# EAGLE board Module_AIO (EAGLE 9.2.1), part 1 of 3
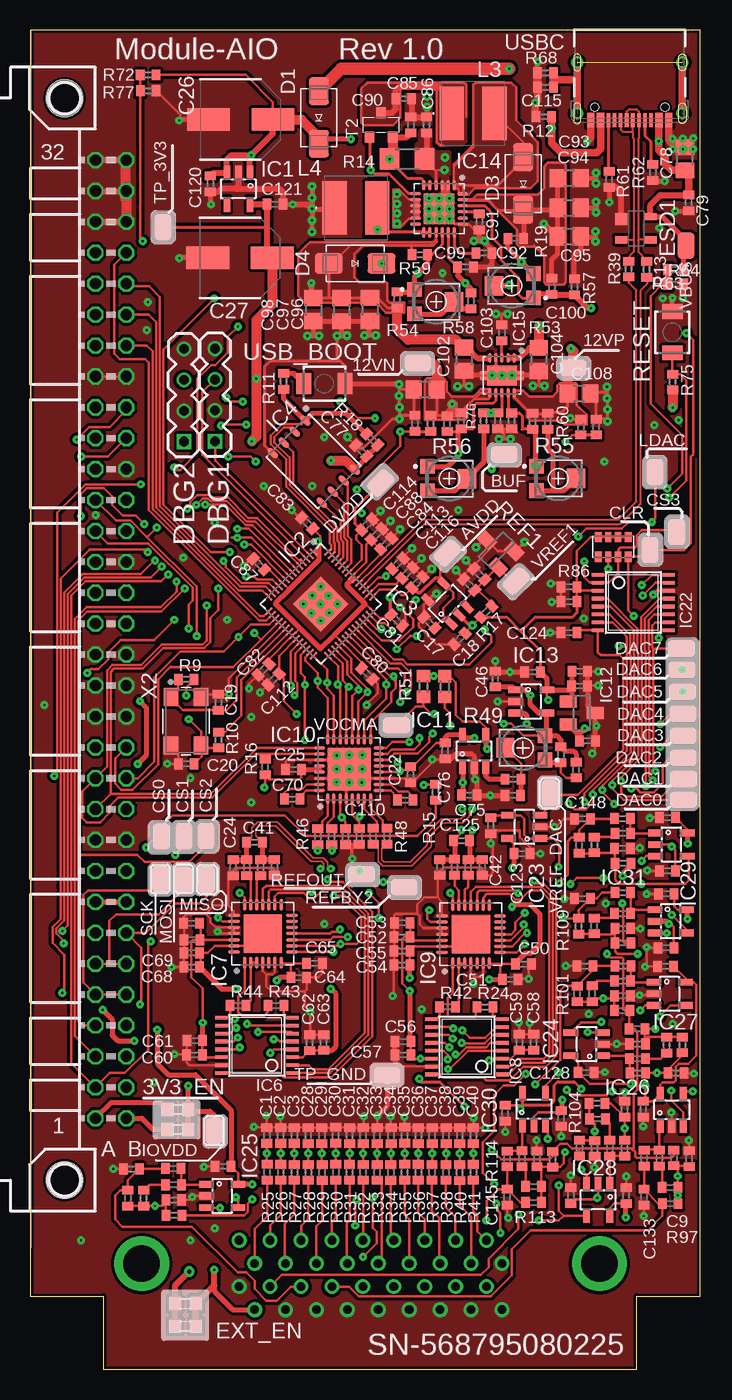
[diagram p0: board, top side]
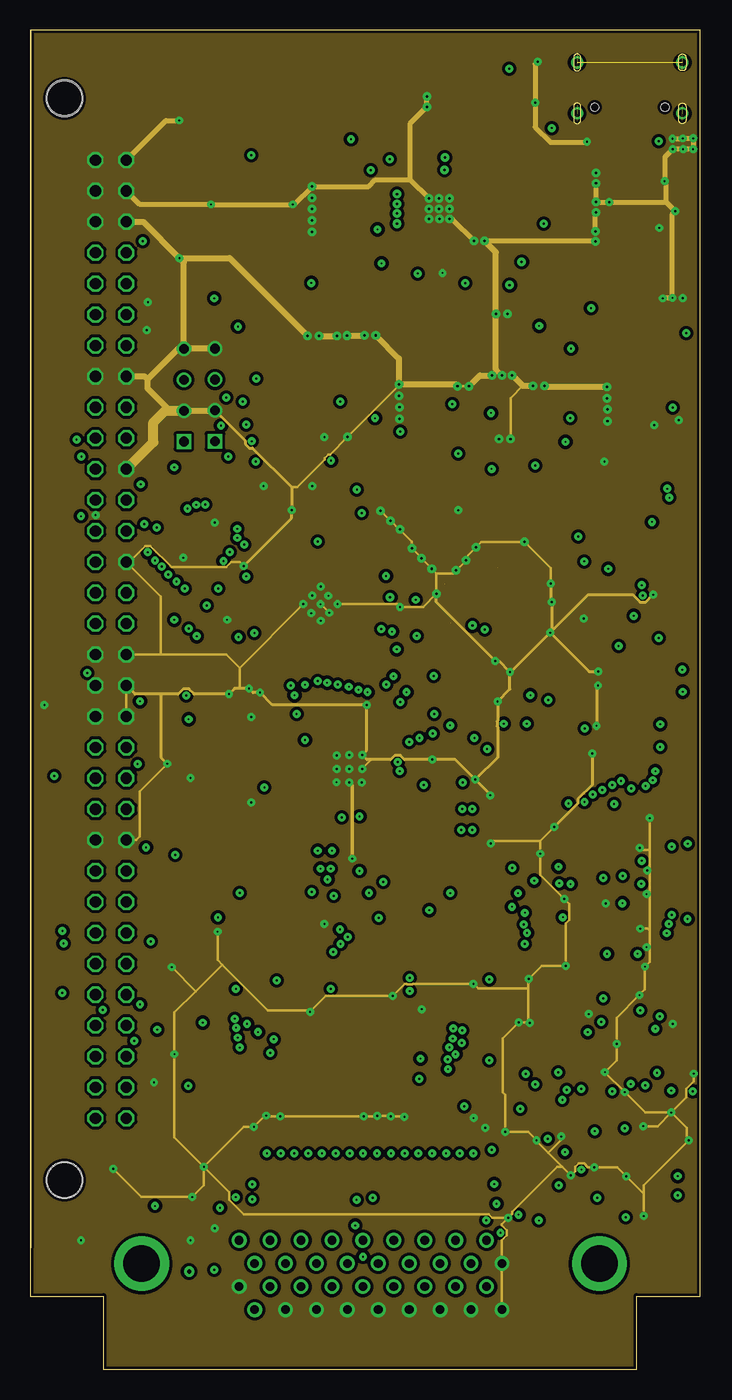
[diagram p1: board, inner layer Route2]
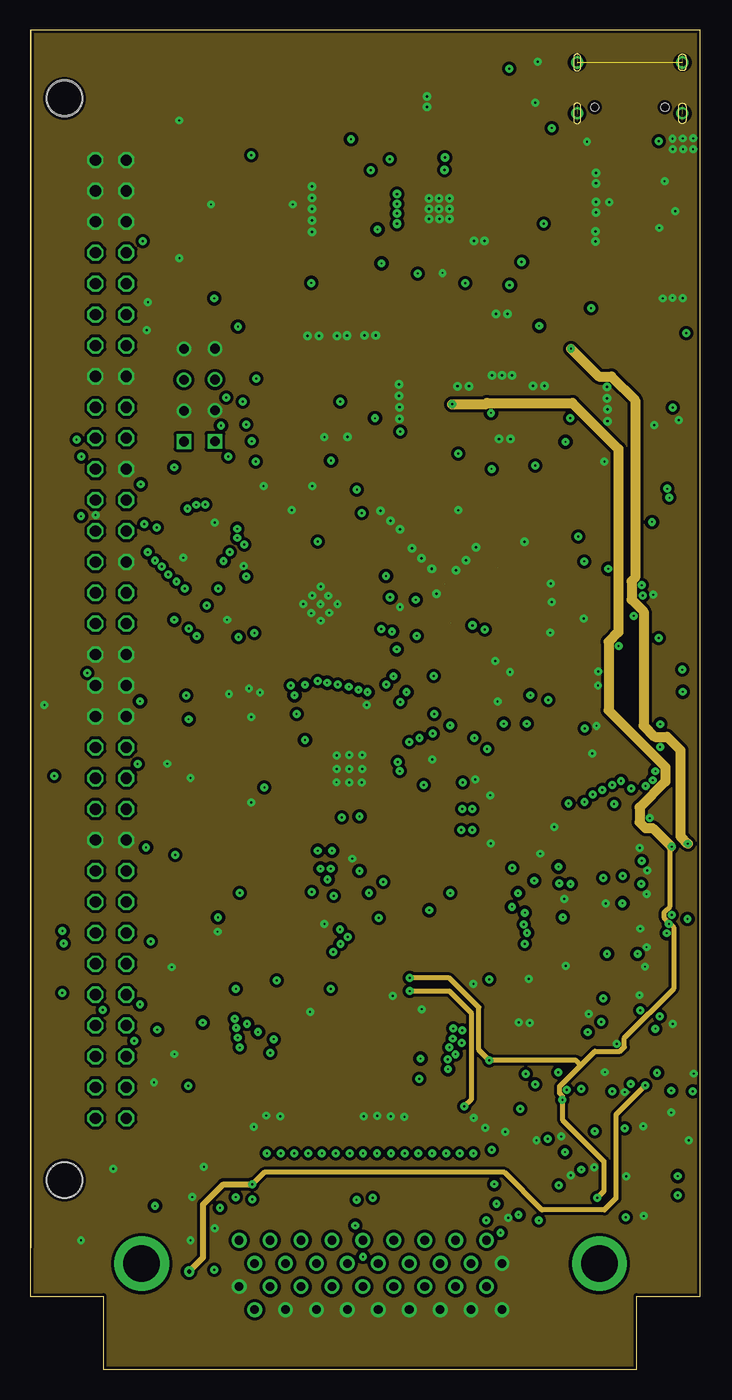
[diagram p2: board, inner layer Route15]
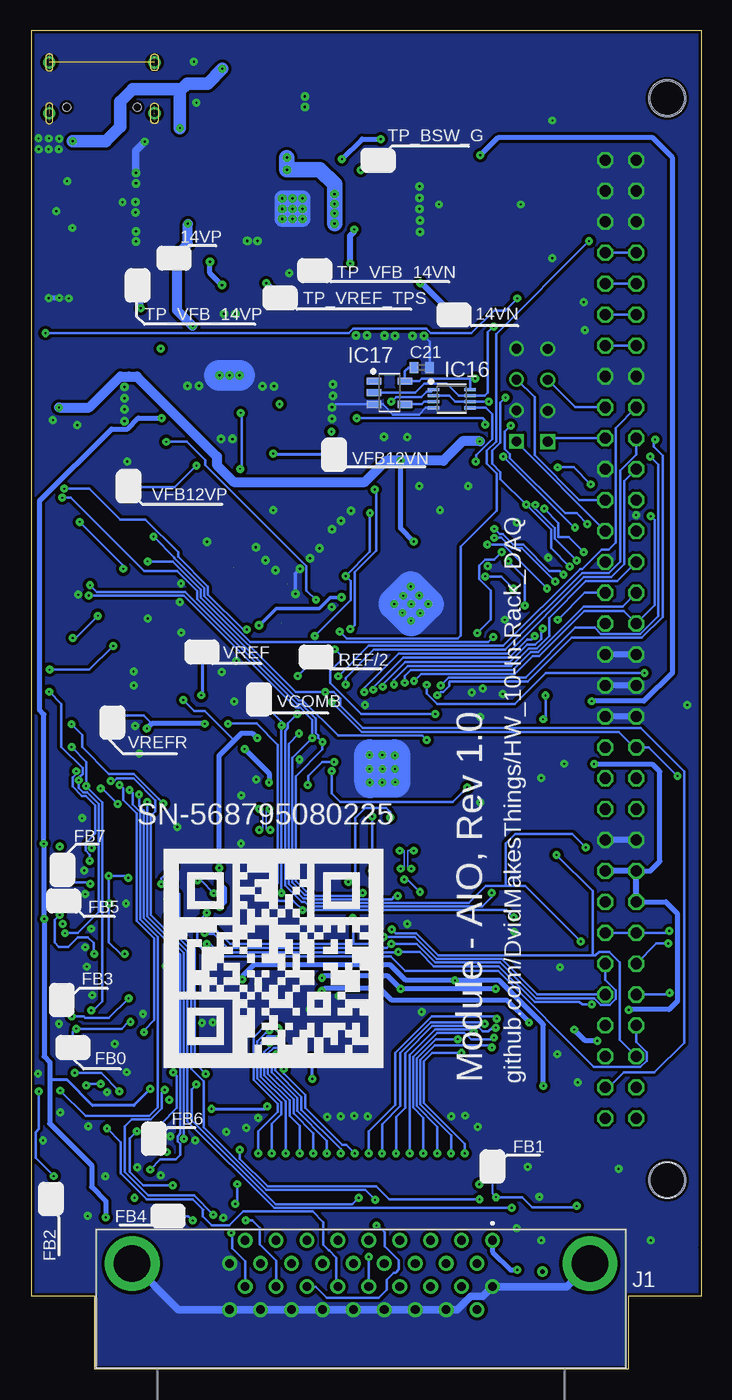
[diagram p3: board, bottom side, seen from below]

Size 55 x 110 mm. Coordinates in mm from the lower left corner, seen from the top.
Outline: 0,6 6,6 6,0 49.8,0 49.8,6 55,6 55,110 0,110 0,6
Copper layers (1+2*15+16): Top 0.035mm / dielectric 0.0994mm / Route2 0.0152mm / dielectric 1.265mm / Route15 0.0152mm / dielectric 0.0994mm / Bottom 0.035mm
Design rules "JLC04161H-3313": minimum track width 3.5mil, minimum drill 0.15mm, track to track 3.5mil, track to pad 3.5mil, pad to pad 3.5mil, via to via 3.5mil, smd to smd 3.5mil, copper to edge 0.2mm, drill to drill 6mil, minimum pad ring 8mil, minimum via ring 0.25mm, stop-mask expansion 0.05mm, vias tented up to drill 16mil, thermal gap 10mil
Net classes: 1 50R_DIFFPAIR: width 0.4 mm, drill 0.15 mm, clearance 0.191 mm; 2 90R_DIFFPAIR: width 0.155 mm, drill 0.15 mm, clearance 0.191 mm; 3 100R_DIFFPAIR: width 0.121 mm, drill 0.15 mm, clearance 0.191 mm
Holes 3 mm at 2.79,15.52 2.79,104.42

## Footprints (pad centres in the part's own frame; a part is rotated, then mirrored left to right if it is on the bottom)
TP = smd 2.2 x 1.4: TP 0,0
C0402 = smd 0.7 x 0.9: 1 -0.65,0; 2 0.65,0
100UF-16V = smd 3.5 x 1.85: 1 -2.65,0; 2 2.65,0
0805 = smd 1.3 x 1.5: 1 -0.95,0; 2 0.95,0
0402 = smd 0.7 x 0.9: 1 -0.65,0; 2 0.65,0
C0805 = smd 1.3 x 1.5: 1 -0.95,0; 2 0.95,0
SMA = smd 2.28 x 1.66: A 2.165,0; C -2.165,0
1X4 = drill 0.8 square: 1 0,3.81 | drill 0.8: 2 0,1.27; 3 0,-1.27; 4 0,-3.81
SOT143 = smd 1 x 1: 1 -0.75,-1.2 | smd 0.6 x 1: 2 0.95,-1.2; 3 0.95,1.2; 4 -0.95,1.2
SOT23-5 = smd 0.55 x 1.2: 1 -0.95,-1.3; 2 0,-1.3; 3 0.95,-1.3; 4 0.95,1.3; 5 -0.95,1.3
QFN40P700X700X100-57T510 = smd 0.837 x 0.22: 1 -3.437,2.6; 2 -3.437,2.2; 3 -3.437,1.8; 4 -3.437,1.4; 5 -3.437,1; 6 -3.437,0.6; 7 -3.437,0.2; 8 -3.437,-0.2; 9 -3.437,-0.6; 10 -3.437,-1; 11 -3.437,-1.4; 12 -3.437,-1.8; 13 -3.437,-2.2; 14 -3.437,-2.6; 29 3.437,-2.6; 30 3.437,-2.2; 31 3.437,-1.8; 32 3.437,-1.4; 33 3.437,-1; 34 3.437,-0.6; 35 3.437,-0.2; 36 3.437,0.2; 37 3.437,0.6; 38 3.437,1; 39 3.437,1.4; 40 3.437,1.8; 41 3.437,2.2; 42 3.437,2.6 | smd 0.22 x 0.837: 15 -2.6,-3.437; 16 -2.2,-3.437; 17 -1.8,-3.437; 18 -1.4,-3.437; 19 -1,-3.437; 20 -0.6,-3.437; 21 -0.2,-3.437; 22 0.2,-3.437; 23 0.6,-3.437; 24 1,-3.437; 25 1.4,-3.437; 26 1.8,-3.437; 27 2.2,-3.437; 28 2.6,-3.437; 43 2.6,3.437; 44 2.2,3.437; 45 1.8,3.437; 46 1.4,3.437; 47 1,3.437; 48 0.6,3.437; 49 0.2,3.437; 50 -0.2,3.437; 51 -0.6,3.437; 52 -1,3.437; 53 -1.4,3.437; 54 -1.8,3.437; 55 -2.2,3.437; 56 -2.6,3.437 | smd 3.2 x 3.2: 57 0,0
SON127P600X500X75-8N = smd 1.012 x 0.432: 1 -2.85,1.905; 2 -2.85,0.635; 3 -2.85,-0.635; 4 -2.85,-1.905; 5 2.85,-1.905; 6 2.85,-0.635; 7 2.85,0.635; 8 2.85,1.905
TSSOP2 = smd 0.305 x 0.991: 1 -2.275,-2.918; 2 -1.625,-2.918; 3 -0.975,-2.918; 4 -0.325,-2.918; 5 0.325,-2.918; 6 0.975,-2.918; 7 1.625,-2.918; 8 2.275,-2.918; 9 2.275,2.918; 10 1.625,2.918; 11 0.975,2.918; 12 0.325,2.918; 13 -0.325,2.918; 14 -0.975,2.918; 15 -1.625,2.918; 16 -2.275,2.918
QFN50P500X500X75-29T314N = smd 0.968 x 0.27: 1 -2.381,1.5; 2 -2.381,1; 3 -2.381,0.5; 4 -2.381,0; 5 -2.381,-0.5; 6 -2.381,-1; 7 -2.381,-1.5; 15 2.381,-1.5; 16 2.381,-1; 17 2.381,-0.5; 18 2.381,0; 19 2.381,0.5; 20 2.381,1; 21 2.381,1.5 | smd 0.27 x 0.968: 8 -1.5,-2.381; 9 -1,-2.381; 10 -0.5,-2.381; 11 0,-2.381; 12 0.5,-2.381; 13 1,-2.381; 14 1.5,-2.381; 22 1.5,2.381; 23 1,2.381; 24 0.5,2.381; 25 0,2.381; 26 -0.5,2.381; 27 -1,2.381; 28 -1.5,2.381 | smd 3.14 x 3.14: 29 0,0
VQFN32-5X5 = smd 0.86 x 0.27: 1 -2.435,1.75; 2 -2.435,1.25; 3 -2.435,0.75; 4 -2.435,0.25; 5 -2.435,-0.25; 6 -2.435,-0.75; 7 -2.435,-1.25; 8 -2.435,-1.75; 17 2.435,-1.75; 18 2.435,-1.25; 19 2.435,-0.75; 20 2.435,-0.25; 21 2.435,0.25; 22 2.435,0.75; 23 2.435,1.25; 24 2.435,1.75 | smd 0.27 x 0.86: 9 -1.75,-2.435; 10 -1.25,-2.435; 11 -0.75,-2.435; 12 -0.25,-2.435; 13 0.25,-2.435; 14 0.75,-2.435; 15 1.25,-2.435; 16 1.75,-2.435; 25 1.75,2.435; 26 1.25,2.435; 27 0.75,2.435; 28 0.25,2.435; 29 -0.25,2.435; 30 -0.75,2.435; 31 -1.25,2.435; 32 -1.75,2.435 | smd 3.5 x 3.5: 33 0,0
SOT23 = smd 1 x 1.4: 1 -0.95,-1.1; 2 0.95,-1.1; 3 0,1.1
VQFN24-4X4-THERMAL2.5X2.5 = smd 0.86 x 0.27: 1 -1.935,1.25; 2 -1.935,0.75; 3 -1.935,0.25; 4 -1.935,-0.25; 5 -1.935,-0.75; 6 -1.935,-1.25; 13 1.935,-1.25; 14 1.935,-0.75; 15 1.935,-0.25; 16 1.935,0.25; 17 1.935,0.75; 18 1.935,1.25 | smd 0.27 x 0.86: 7 -1.25,-1.935; 8 -0.75,-1.935; 9 -0.25,-1.935; 10 0.25,-1.935; 11 0.75,-1.935; 12 1.25,-1.935; 19 1.25,1.935; 20 0.75,1.935; 21 0.25,1.935; 22 -0.25,1.935; 23 -0.75,1.935; 24 -1.25,1.935 | smd 2.5 x 2.5: 25 0,0
WSON10-3X3 = smd 0.86 x 0.264: 1 -1.435,1; 2 -1.435,0.5; 3 -1.435,0; 4 -1.435,-0.5; 5 -1.435,-1; 6 1.435,-1; 7 1.435,-0.5; 8 1.435,0; 9 1.435,0.5; 10 1.435,1 | smd 1.65 x 2.4: PAD 0,0 | smd 0.264 x 0.86: PAD1 -0.25,1.435; PAD2 -0.25,-1.435; PAD3 0.25,-1.435; PAD4 0.25,1.435
SOP50P310X90-8N = smd 0.923 x 0.268: 1 -1.503,0.75; 2 -1.503,0.25; 3 -1.503,-0.25; 4 -1.503,-0.75; 5 1.503,-0.75; 6 1.503,-0.25; 7 1.503,0.25; 8 1.503,0.75
SOT95P280X145-5N = smd 1.186 x 0.597: 1 -1.264,0.95; 2 -1.264,0; 3 -1.264,-0.95; 4 1.264,-0.95; 5 1.264,0.95
TSSOP16 = smd 0.305 x 0.991: 1 -2.275,-2.918; 2 -1.625,-2.918; 3 -0.975,-2.918; 4 -0.325,-2.918; 5 0.325,-2.918; 6 0.975,-2.918; 7 1.625,-2.918; 8 2.275,-2.918; 9 2.275,2.918; 10 1.625,2.918; 11 0.975,2.918; 12 0.325,2.918; 13 -0.325,2.918; 14 -0.975,2.918; 15 -1.625,2.918; 16 -2.275,2.918
MDB36 = drill 0.71 pad 1.217: 1 10.16,8.89; 2 8.89,6.99; 3 7.62,8.89; 4 6.35,6.99; 5 5.08,8.89; 6 3.81,6.99; 7 2.54,8.89; 8 1.27,6.99; 9 0,8.89; 10 -1.27,6.99; 11 -2.54,8.89; 12 -3.81,6.99; 13 -5.08,8.89; 14 -6.35,6.99; 15 -7.62,8.89; 16 -8.89,6.99; 17 -10.16,8.89; 18 -11.43,6.99; 19 10.16,5.09; 20 8.89,3.19; 21 7.62,5.09; 22 6.35,3.19; 23 5.08,5.09; 24 3.81,3.19; 25 2.54,5.09; 26 1.27,3.19; 27 0,5.09; 28 -1.27,3.19; 29 -2.54,5.09; 30 -3.81,3.19; 31 -5.08,5.09; 32 -6.35,3.19; 33 -7.62,5.09; 34 -8.89,3.19; 35 -10.16,5.09; 36 -11.43,3.19 | drill 2.85 pad 4.275: MH1 18.17,6.99; MH2 -19.44,6.99
0603 = smd 1 x 1.1: 1 -0.85,0; 2 0.85,0
SRR5228A = smd 4.4 x 2: 1 0,1.75; 2 0,-1.75
1206 = smd 1.6 x 1.803: 1 -1.422,0; 2 1.422,0
TC33X = smd 1.2 x 1.2: 1 -1,-1.8; 3 1,-1.8 | smd 1.6 x 1.5: 2 0,1.45
YC164-JR-0733RL = smd 0.67 x 0.85: 1 -1.24,-0.81; 4 1.24,-0.81; 5 1.24,0.81; 8 -1.24,0.81 | smd 0.59 x 0.85: 2 -0.4,-0.81; 3 0.4,-0.81; 6 0.4,0.81; 7 -0.4,0.81
SWITCH-OMRON_B3U-1000P = smd 1.2 x 1.7: 1 -1.7,0; 2 1.7,0
MICRO3 = smd 0.8 x 0.9: 1 -0.95,-1; 2 0.95,-1; 3 0,1
629722000214 = smd 0.3 x 1.15: A1 -3.35,4.745; A4 -2.55,4.745; A5 -1.25,4.745; A6 -0.25,4.745; A7 0.25,4.745; A8 1.25,4.745; A9 2.55,4.745; A12 3.35,4.745; B1 3.05,4.745; B4 2.25,4.745; B5 1.75,4.745; B6 0.75,4.745; B7 -0.75,4.745; B8 -1.75,4.745; B9 -2.25,4.745; B12 -3.05,4.745 | drill 0.6 pad 1: S1 -4.32,4.18; S2 4.32,4.18; S3 -4.32,0; S4 4.32,0 | hole 0.65: -2.89,3.68; 2.89,3.68
CON-VG_MAB64 = drill 0.914 octagon: A1 -2.54,39.37; A2 -2.54,36.83; A3 -2.54,34.29; A4 -2.54,31.75; A5 -2.54,29.21; A6 -2.54,26.67; A7 -2.54,24.13; A8 -2.54,21.59; A9 -2.54,19.05; A10 -2.54,16.51; A11 -2.54,13.97; A12 -2.54,11.43; A13 -2.54,8.89; A14 -2.54,6.35; A15 -2.54,3.81; A16 -2.54,1.27; A17 -2.54,-1.27; A18 -2.54,-3.81; A19 -2.54,-6.35; A20 -2.54,-8.89; A21 -2.54,-11.43; A22 -2.54,-13.97; A23 -2.54,-16.51; A24 -2.54,-19.05; A25 -2.54,-21.59; A26 -2.54,-24.13; A27 -2.54,-26.67; A28 -2.54,-29.21; A29 -2.54,-31.75; A30 -2.54,-34.29; A31 -2.54,-36.83; A32 -2.54,-39.37; B1 -5.08,39.37; B2 -5.08,36.83; B3 -5.08,34.29; B4 -5.08,31.75; B5 -5.08,29.21; B6 -5.08,26.67; B7 -5.08,24.13; B8 -5.08,21.59; B9 -5.08,19.05; B10 -5.08,16.51; B11 -5.08,13.97; B12 -5.08,11.43; B13 -5.08,8.89; B14 -5.08,6.35; B15 -5.08,3.81; B16 -5.08,1.27; B17 -5.08,-1.27; B18 -5.08,-3.81; B19 -5.08,-6.35; B20 -5.08,-8.89; B21 -5.08,-11.43; B22 -5.08,-13.97; B23 -5.08,-16.51; B24 -5.08,-19.05; B25 -5.08,-21.59; B26 -5.08,-24.13; B27 -5.08,-26.67; B28 -5.08,-29.21; B29 -5.08,-31.75; B30 -5.08,-34.29; B31 -5.08,-36.83; B32 -5.08,-39.37 | hole 2.794: 0,44.45; 0,-44.45
OSCCC500X320X130 = smd 1.487 x 1.187: 1 -1.988,-1.238; 2 1.988,-1.238; 3 1.988,1.238; 4 -1.988,1.238

## Placement (x,y rotation side)
12VN  TP  [TP]  31.81,82.67 0 top
12VP  TP  [TP]  44.59,82.29 0 top
14VN  TP  [TP]  20.31,86.61 180 bottom
14VP  TP  [TP]  43.3,91.33 0 bottom
AVDD  TP  [TP]  34.26,67.04 45 top
BUF  TP  [TP]  38.92,75.17 0 top
C1  100nF  [C0402]  19.43,19.2 90 top
C2  100nF  [C0402]  20.55,19.2 90 top
C3  100nF  [C0402]  21.68,19.2 90 top
C4  100nF  [C0402]  44.4,14.27 90 top
C5  100nF  [C0402]  52.2,34.61 180 top
C6  100nF  [C0402]  43.6,20.6 270 top
C7  100nF  [C0402]  52.32,40.94 180 top
C8  100nF  [C0402]  9.29,14.05 270 top
C9  100nF  [C0402]  52.53,14.92 0 top
C10  100nF  [C0402]  46.14,30.85 270 top
C11  100nF  [C0402]  46.33,43.07 270 top
C12  100nF  [C0402]  41.33,15 0 top
C13  100nF  [C0402]  46.3,36.41 270 top
C14  100nF  [C0402]  46.58,20.56 180 top
C15  1uF  [C0402]  36.03,64.46 135 top
C16  100nF  [C0402]  36.87,65.32 135 top
C17  100nF  [C0402]  32.77,61.33 135 top
C18  100nF  [C0402]  35.25,60.01 225 top
C19  15pF  [C0402]  15.44,54.8 90 top
C20  15pF  [C0402]  12.79,49.73 180 top
C21  100nF  [C0402]  22.96,82.3 0 bottom
C22  100nF  [C0402]  31.22,48.83 270 top
C23  270pF  [C0402]  20.04,41.23 270 top
C24  270pF  [C0402]  16.64,41.19 90 top
C25  100nF  [C0402]  21.61,49.27 180 top
C26  100uF 16V  [100UF-16V]  17.27,102.67 180 top
C27  100uF 16V  [100UF-16V]  17.21,91.31 180 top
C28  100nF  [C0402]  22.82,19.19 90 top
C29  100nF  [C0402]  23.95,19.19 90 top
C30  100nF  [C0402]  25.07,19.21 90 top
C31  100nF  [C0402]  26.22,19.19 90 top
C32  100nF  [C0402]  27.32,19.19 90 top
C33  100nF  [C0402]  28.47,19.19 90 top
C34  100nF  [C0402]  29.62,19.19 90 top
C35  100nF  [C0402]  30.74,19.21 90 top
C36  100nF  [C0402]  31.87,19.19 90 top
C37  100nF  [C0402]  32.99,19.19 90 top
C38  100nF  [C0402]  34.14,19.19 90 top
C39  100nF  [C0402]  35.27,19.19 90 top
C40  100nF  [C0402]  36.39,19.19 90 top
C41  680pF  [C0402]  18.39,43.3 180 top
C42  270pF  [C0402]  37.12,41.23 270 top
C43  270pF  [C0402]  33.64,41.21 90 top
C44  680pF  [C0402]  35.42,43.42 180 top
C45  100nF  [C0402]  45.11,56.13 0 top
C46  100nF  [C0402]  38.18,56.71 90 top
C47  10uF  [C0402]  45.12,57.34 0 top
C48  [C0402]  45.75,51.63 0 top
C49  100nF  [C0402]  41.23,57.28 180 top
C50  1uF  [C0402]  40.49,33.29 0 top
C51  100nF  [C0402]  39.41,32.02 0 top
C52  1uF  [C0402]  30.53,35.49 180 top
C53  100nF  [C0402]  30.54,36.67 180 top
C54  1uF  [C0402]  30.51,33.2 180 top
C55  100nF  [C0402]  30.52,34.34 180 top
C56  1uF  [C0402]  30.61,26.92 180 top
C57  100nF  [C0402]  30.59,25.82 180 top
C58  1uF  [C0402]  41.34,26.86 90 top
C59  100nF  [C0402]  40.16,26.86 90 top
C60  1uF  [C0402]  13.47,25.82 180 top
C61  100nF  [C0402]  13.49,26.99 180 top
C62  1uF  [C0402]  22.94,26.83 90 top
C63  100nF  [C0402]  24.09,26.84 90 top
C64  1uF  [C0402]  22.04,32.17 0 top
C65  100nF  [C0402]  23.34,33.34 0 top
C66  1uF  [C0402]  13.26,35.27 180 top
C67  100nF  [C0402]  13.22,36.64 180 top
C68  1uF  [C0402]  13.24,33.05 180 top
C69  100nF  [C0402]  13.24,34.21 180 top
C70  10uF  [C0402]  21.51,46.84 0 top
C71  100nF  [C0402]  25.88,43.76 270 top
C72  1uF  [C0402]  44.82,49.23 270 top
C73  100nF  [C0402]  43.57,50.49 270 top
C74  [C0402]  39.62,47.15 180 top
C75  100nF  [C0402]  36.04,47.16 0 top
C76  100nF  [C0402]  34.07,50.8 270 top
C77  100nF  [C0402]  27.17,75.46 135 top
C78  10uF  [0805]  53.76,99.45 90 top
C79  100nF  [0402]  54.07,95.83 270 top
C80  100nF  [C0402]  27.65,57.14 315 top
C81  100nF  [C0402]  30.1,61.52 315 top
C82  100nF  [C0402]  19.16,57.49 225 top
C83  100nF  [C0402]  22.73,69.52 135 top
C84  100nF  [C0402]  29.21,67.83 45 top
C85  4.7uF  [C0402]  31.25,102.23 90 top
C86  100nF  [C0402]  32.53,102.24 90 top
C87  100nF  [C0402]  18.77,66.14 135 top
C88  100nF  [C0402]  28.44,68.61 45 top
C89  100nF  [C0402]  31.79,64.64 45 top
C90  10uF  [C0402]  30.67,104.39 0 top
C91  10nF  [C0402]  36.88,94.27 270 top
C92  4.7nF  [C0402]  37.26,91.71 0 top
C93  22uF  [C0805]  44.26,97.86 0 top
C94  22uF  [C0805]  44.26,95.41 0 top
C95  22uF  [C0805]  44.25,93.06 0 top
C96  22uF  [C0805]  27.88,87.06 270 top
C97  22uF  [C0805]  25.56,87.05 270 top
C98  22uF  [C0805]  23.23,87.05 270 top
C99  220nF  [C0402]  35.74,90.56 180 top
C100  10pF  [C0402]  42.83,88.97 270 top
C101  10pF  [C0402]  30.12,87.84 90 top
C102  10uF  [C0805]  35.6,82.97 270 top
C103  10nF  [C0402]  38.73,85.14 90 top
C104  10uF  [C0805]  41.76,82.96 270 top
C105  220nF  [C0402]  38.38,77.91 90 top
C106  10nF  [C0402]  34.23,77.69 270 top
C107  10nF  [C0402]  41.25,77.87 90 top
C108  22uF  [C0805]  45.06,80.16 0 top
C109  22uF  [C0805]  32.42,80.48 180 top
C110  10uF  [C0402]  30.79,46.75 180 top
C111  100nF  [C0402]  27.01,43.77 270 top
C112  100nF  [C0402]  19.97,56.67 225 top
C113  100nF  [C0402]  30.16,66.19 45 top
C114  100nF  [C0402]  27.65,69.39 45 top
C115  4.7nF  [0402]  42.3,105.33 180 top
C116  100nF  [C0402]  30.96,65.43 45 top
C120  100nF  [C0402]  14.77,97.38 270 top
C121  100nF  [C0402]  20.09,95.7 0 top
C122  1uF  [C0402]  44.24,64.27 180 top
C123  100nF  [C0402]  40.37,42.36 0 top
C124  1uF  [C0402]  44.24,60.52 180 top
C125  100nF  [C0402]  37.81,44.65 270 top
C126  100nF  [C0402]  44.24,63.06 180 top
C127  20nF  [C0402]  53.04,24.33 0 top
C128  100nF  [C0402]  45.63,24.37 0 top
C129  100nF  [C0402]  52.26,26.63 90 top
C130  20nF  [C0402]  8.3,16.45 180 top
C131  100nF  [C0402]  15.83,16.66 180 top
C133  20nF  [C0402]  50.4,14.13 270 top
C134  100nF  [C0402]  50.34,21.36 270 top
C136  20nF  [C0402]  45.56,33.12 180 top
C137  100nF  [C0402]  52.17,33.1 180 top
C139  12nF  [C0402]  48.81,21.37 90 top
C140  100nF  [C0402]  48.93,14.26 90 top
C142  12nF  [C0402]  45.34,38.67 180 top
C143  100nF  [C0402]  52.23,39.05 180 top
C145  12nF  [C0402]  39.15,14.13 270 top
C146  100nF  [C0402]  39,21.03 270 top
C148  12nF  [C0402]  45.35,45.22 180 top
C149  100nF  [C0402]  52.34,45.31 180 top
CLR  TP  [TP]  50.91,67.3 270 top
CS0  TP  [TP]  10.76,43.76 270 top
CS1  TP  [TP]  12.62,43.78 90 top
CS2  TP  [TP]  14.41,43.81 270 top
CS3  TP  [TP]  53.09,68.78 270 top
D1  SS12  [SMA]  23.69,102.84 90 top
D3  SS12  [SMA]  40.48,97.41 90 top
D4  SS12  [SMA]  26.67,90.86 180 top
DAC0  TP  [TP]  53.65,46.77 180 top
DAC1  TP  [TP]  53.64,48.49 180 top
DAC2  TP  [TP]  53.63,50.23 180 top
DAC3  TP  [TP]  53.62,52.03 180 top
DAC4  TP  [TP]  53.6,53.85 180 top
DAC5  TP  [TP]  53.57,55.66 180 top
DAC6  TP  [TP]  53.53,57.47 180 top
DAC7  TP  [TP]  53.49,59.21 180 top
DBG1  [1X4]  15.16,80.05 180 top
DBG2  [1X4]  12.6,80.02 180 top
DVDD  TP  [TP]  28.76,72.82 225 top
ESD1  SP0503BAHTG-ES  [SOT143]  49.73,93.75 270 top
FB0  TP  [TP]  51.61,26.44 180 bottom
FB1  TP  [TP]  17.16,16.68 90 bottom
FB2  TP  [TP]  53.47,13.95 270 bottom
FB3  TP  [TP]  52.56,30.32 270 bottom
FB4  TP  [TP]  43.8,12.56 180 bottom
FB5  TP  [TP]  52.35,38.51 180 bottom
FB6  TP  [TP]  44.98,18.94 270 bottom
FB7  TP  [TP]  52.53,40.96 270 bottom
IC1  MIC5504-3.3YM5-TR  [SOT23-5]  17.09,96.98 180 top
IC2  RP2040  [QFN40P700X700X100-57T510]  23.85,62.87 315 top
IC3  MCP6001AIDBVRG  [SOT23-5]  34.26,62.91 45 top
IC4  W25Q128JVPIQ  [SON127P600X500X75-8N]  23.26,74.58 315 top
IC6  DG409  [TSSOP2]  18.61,26.6 90 top
IC7  ADA4254ACPZ  [QFN50P500X500X75-29T314N]  19.09,35.78 90 top
IC8  DG409  [TSSOP2]  35.86,26.48 90 top
IC9  ADA4254ACPZ  [QFN50P500X500X75-29T314N]  36.19,35.73 90 top
IC10  ADS9234RIRHBR  [VQFN32-5X5]  26.18,49.3 90 top
IC11  AD8605  [SOT23-5]  36.45,50.79 0 top
IC12  MCP1525T-I/TT  [SOT23]  45.28,53.91 270 top
IC13  AD8605  [SOT23-5]  41.13,54.86 270 top
IC14  TPS65131  [VQFN24-4X4-THERMAL2.5X2.5]  33.57,95.34 270 top
IC15  TPS7A39  [WSON10-3X3]  38.73,81.65 270 top
IC16  SN74LVC2G66  [SOP50P310X90-8N]  20.49,79.74 0 bottom
IC17  74LVC1G04  [SOT95P280X145-5N]  25.6,80.23 0 bottom
IC22  DAC8568  [TSSOP16]  49.53,62.99 270 top
IC23  AD8605  [SOT23-5]  40.57,44.56 90 top
IC24  OPA192  [SOT23-5]  45.68,26.7 90 top
IC25  OPA192  [SOT23-5]  15.75,14.23 270 top
IC26  OPA192  [SOT23-5]  52.68,21.31 0 top
IC27  OPA192  [SOT23-5]  52.51,30.84 270 top
IC28  OPA197  [SOT23-5]  46.63,13.91 180 top
IC29  OPA197  [SOT23-5]  52.59,36.79 270 top
IC30  OPA197  [SOT23-5]  41.36,21.36 0 top
IC31  OPA197  [SOT23-5]  52.65,43.1 270 top
IOVDD  TP  [TP]  15.09,19.57 270 top
J1  [MDB36]  27.3,1.69 0 bottom
JP-3V3-1  0R  [0603]  12.11,21.31 180 top
JP-3V3-2  0R  [0603]  12.11,19.69 180 top
JP-EXT-1  0R  [0603]  12.74,5.37 0 top
JP-EXT-2  0R  [0603]  12.74,3.52 0 top
L3  SRR5228A-4R7Y  [SRR5228A]  36.36,103.17 90 top
L4  SRR5228A-4R7Y  [SRR5228A]  26.73,95.41 90 top
LDAC  TP  [TP]  51.32,73.71 270 top
MISO  TP  [TP]  14.47,40.22 270 top
MOSI  TP  [TP]  12.57,40.24 270 top
R1  10R  [0402]  49.87,25.51 0 top
R2  10R  [0402]  11.75,15.15 180 top
R3  10R  [0402]  51.67,17.35 270 top
R4  10R  [0402]  48.63,31.88 180 top
R5  10R  [0402]  48.66,44.03 180 top
R6  10R  [0402]  40.38,17.3 270 top
R7  10R  [0402]  48.64,37.43 180 top
R8  10R  [0402]  47.59,18.16 90 top
R9  0R  [0402]  12.8,56.68 0 top
R10  1K  [0402]  15.46,51.69 90 top
R11  1K  [0402]  20.8,81.17 270 top
R12  2.2K 1%  [0402]  42.16,102.91 180 top
R13  27R  [0402]  50.62,90.37 270 top
R14  100R  [1206]  30.93,99.44 180 top
R15  0R  [0402]  33.28,47.4 90 top
R16  10K  [0402]  19.27,49.47 90 top
R17  4.7K  [0402]  37.45,62.24 225 top
R18  DNI  [0402]  28.06,76.38 315 top
R19  950K 0.1%  [0402]  39.86,92.89 180 top
R20  200R  [0402]  18.9,41.21 270 top
R21  200R  [0402]  17.78,41.19 270 top
R22  200R  [0402]  35.95,41.22 270 top
R23  200R  [0402]  34.84,41.23 270 top
R24  0R  [0402]  37.34,29.74 0 top
R25  1K  [0402]  19.43,16.18 90 top
R26  1K  [0402]  20.56,16.17 90 top
R27  1K  [0402]  21.68,16.17 90 top
R28  1K  [0402]  22.84,16.16 90 top
R29  1K  [0402]  23.96,16.16 90 top
R30  1K  [0402]  25.09,16.18 90 top
R31  1K  [0402]  26.21,16.17 90 top
R32  1K  [0402]  27.34,16.17 90 top
R33  1K  [0402]  28.48,16.16 90 top
R34  1K  [0402]  29.61,16.16 90 top
R35  1K  [0402]  30.73,16.18 90 top
R36  1K  [0402]  31.86,16.17 90 top
R37  1K  [0402]  32.98,16.17 90 top
R38  1K  [0402]  34.13,16.16 90 top
R39  27R  [0402]  49.13,90.38 270 top
R40  1K  [0402]  35.26,16.15 90 top
R41  1K  [0402]  36.38,16.17 90 top
R42  0R  [0402]  34.27,29.77 0 top
R43  0R  [0402]  20.16,29.88 0 top
R44  0R  [0402]  17.05,29.88 0 top
R45  0R  [0402]  23.61,43.75 270 top
R46  0R  [0402]  24.74,43.74 90 top
R47  0R  [0402]  28.15,43.8 90 top
R48  0R  [0402]  29.29,43.8 270 top
R49  [TC33X]  40.46,51.05 90 top
R50  100R  [0402]  39.65,48.47 180 top
R51  0R  [0603]  32.28,56.09 270 top
R52  0R  [0603]  34.03,56.08 90 top
R53  [TC33X]  39.52,89.02 90 top
R54  [TC33X]  33.34,87.7 270 top
R55  20K  [TC33X]  43.37,73.19 270 top
R56  20K  [TC33X]  34.42,73.17 270 top
R57  102K 0.1%  [0402]  44.69,88.94 90 top
R58  1.2M 0.1%  [0402]  36.19,87.77 270 top
R59  137K 0.1%  [0402]  31.98,91.56 180 top
R60  75K 0.1%  [0402]  42.49,77.87 270 top
R61  5.1K  [0402]  47.53,97.76 270 top
R62  5.1K  [0402]  51.13,98.34 270 top
R63  10K  [0402]  52.99,90.34 180 top
R64  10K  [0402]  52.98,89.14 0 top
R67  10K 0.1%  [0402]  32.87,77.72 270 top
R68  1M  [0402]  42.3,106.51 180 top
R69  100K 0.1%  [0402]  31.59,77.7 90 top
R70  100K 0.1%  [0402]  45.21,77.4 270 top
R71  10K 0.1%  [0402]  46.46,77.41 90 top
R72  10K  [0402]  9.67,106.34 0 top
R73  10K 0.1%  [0402]  39.52,77.91 270 top
R74  90K 0.1%  [0402]  37.22,77.92 270 top
R75  10K  [0402]  52.76,81.11 90 top
R76  10K 0.1%  [0402]  35.38,77.92 90 top
R77  10K  [0402]  9.68,105.04 180 top
R86  CRA034RF100RP05Z  [YC164-JR-0733RL]  47.87,67.56 0 top
R87  10K 0.1%  [0402]  49.86,26.72 0 top
R88  10K 0.1%  [0402]  49.82,27.97 0 top
R89  3.2K 1%  [0402]  53.55,26.64 270 top
R90  68R 1%  [0402]  49.89,24.33 0 top
R91  10K 0.1%  [0402]  11.77,13.9 180 top
R92  10K 0.1%  [0402]  11.79,12.65 180 top
R93  3.2K 1%  [0402]  8,14.05 90 top
R94  68R 1%  [0402]  11.73,16.48 180 top
R95  10K 0.1%  [0402]  54.1,17.3 270 top
R96  10K 0.1%  [0402]  52.85,17.36 270 top
R97  3.2K 1%  [0402]  52.56,13.6 180 top
R98  68R 1%  [0402]  50.41,17.35 270 top
R99  10K 0.1%  [0402]  48.62,30.67 180 top
R100  10K 0.1%  [0402]  48.61,29.46 180 top
R101  3.2K 1%  [0402]  44.91,30.83 90 top
R102  68R 1%  [0402]  48.67,33.12 180 top
R103  10K 0.1%  [0402]  46.35,18.14 90 top
R104  10K 0.1%  [0402]  45.1,18.15 90 top
R105  86K 1%  [0402]  46.55,21.85 0 top
R106  110R 1%  [0402]  48.81,18.15 90 top
R107  10K 0.1%  [0402]  48.66,36.2 180 top
R108  10K 0.1%  [0402]  48.67,35.02 180 top
R109  86K 1%  [0402]  45.03,36.39 90 top
R110  110R 1%  [0402]  48.66,39.15 180 top
R111  10K 0.1%  [0402]  41.61,17.28 270 top
R112  10K 0.1%  [0402]  42.89,17.24 270 top
R113  86K 1%  [0402]  41.32,13.7 180 top
R114  110R 1%  [0402]  39.16,17.27 270 top
R115  10K 0.1%  [0402]  48.63,42.8 180 top
R116  10K 0.1%  [0402]  48.67,41.56 180 top
R117  86K 1%  [0402]  45.07,43.04 90 top
R118  110R 1%  [0402]  48.63,45.23 180 top
REF1  LM4040BXX  [SOT23]  38.29,67.32 45 top
REF/2  TP  [TP]  31.65,58.43 180 bottom
REFBY2  TP  [TP]  30.7,39.59 180 top
REFOUT  TP  [TP]  27.19,40.67 0 top
RESET  B3U-1000P-B  [SWITCH-OMRON_B3U-1000P]  52.73,85.19 90 top
SCK  TP  [TP]  10.69,40.27 270 top
T2  IRLML5203  [MICRO3]  28.8,102.23 0 top
TP_3V3  TP  [TP]  10.89,93.83 90 top
TP_BSW_G  TP  [TP]  26.53,99.33 180 bottom
TP_GND  TP  [TP]  29.29,24.17 0 top
TP_VFB_14VN  TP  [TP]  31.77,90.25 180 bottom
TP_VFB_14VP  TP  [TP]  46.28,88.98 270 bottom
TP_VREF_TPS  TP  [TP]  34.53,88.01 180 bottom
USB_BOOT  B3U-1000P-B  [SWITCH-OMRON_B3U-1000P]  24.15,80.97 0 top
USBC  USB-TYPE-C-018  [629722000214]  49.23,107.37 180 top
VBUS  TP  [TP]  53.84,92.31 270 top
VCOMB  TP  [TP]  36.27,54.99 270 bottom
VFB12VN  TP  [TP]  30.16,75.15 270 bottom
VFB12VP  TP  [TP]  47.04,72.46 90 bottom
VOCMA  TP  [TP]  30.08,52.89 0 top
VREF  TP  [TP]  40.98,58.9 0 bottom
VREF1  TP  [TP]  39.9,64.74 45 top
VREF_DAC  TP  [TP]  42.62,47.33 270 top
VREFR  TP  [TP]  48.37,53.17 270 bottom
X1  CON-VG_MAB64  [CON-VG_MAB64]  2.8,59.98 180 top
X2  K5A1200015304P  [OSCCC500X320X130]  12.78,53.23 270 top

## Library data of the parts
12VN 12VP 14VN 14VP AVDD BUF C1-C116 C120-C131 C133 C134 C136 C137 C139 C140 C142 C143 C145 C146 C148 C149 CLR CS0 CS1-CS3 DAC0 DAC1-DAC7 DVDD FB0 FB1-FB7 IOVDD JP-3V3-1 JP-3V3-2 JP-EXT-1 JP-EXT-2 L3 L4 LDAC MISO MOSI R1-R64 R67-R77 R87-R118 REF/2 REFBY2 REFOUT SCK TP_3V3 TP_BSW_G TP_GND TP_VFB_14VN TP_VFB_14VP TP_VREF_TPS VBUS VCOMB VFB12VN VFB12VP VOCMA VREF VREF1 VREF_DAC VREFR X2 = ds_passive
D1 D3 D4 = Diodes; CREATED_BY: PCBLayout.com; DIGIKEY_PART_NUMBER: SS12FSCT-ND; MANUFACTURER: ON Semiconductor; MPN: SS12; PACKAGE: SMA (DO-214AC)
DBG1 DBG2 J1 X1 = ds_con
ESD1 IC6 IC8 IC10 IC16 IC22 = ds_ic_peripherals
IC1 IC12 IC14 IC15 REF1 = ds_ic_vreg
IC2 = ds_ic_mcu
IC3 IC7 IC9 IC11 IC13 IC23-IC31 = ds_ic_opa
IC4 = MCU
IC17 = ds_ic_logic
R86 = Resistor Array; CREATED_BY: PCBLayout.com; DIGIKEY_PN: YC164J-33TR-ND; MANUFACTURER: Yageo; MPN: YC164-JR-0733RL; PACKAGE: 1206
RESET USB_BOOT = 52101-101-REV-A_v16
T2 = transistor-power
USBC = Wurth_Connectors_WR-USB; APPLICATION: USB 2.0; DATASHEET-URL: https://www.we-online.com/redexpert/spec/629722000214?ae; GERDER: Receptacle; INTERFACE-TYPE: Type C; IR: 5A; MOUNT: SMT; PACKAGING: Tape and Reel; PART-NUMBER: 629722000214; PINS: 16; TYPE: Horizontal; WORKING-VOLTAGE: 20V(AC)

## Nets
!ADC_RST: IC2.12 IC10.26 R16.2 X1.A12
!MISO_SEL: IC16.3 IC17.4
!QSPI_SS: IC2.56 IC4.1 R11.2 R18.1
+1V1: C112.1 C113.1 C114.1 DVDD.TP IC2.23 IC2.45 IC2.50
+3V3: C18.1 C21.1 C22.1 C25.1 C27.1 C45.1 C47.1 C49.1 C50.1 C51.1 C64.1 C65.1 C76.1 C77.1 C80.1 C81.1 C82.1 C83.1 C84.1 C87.1 C88.1 C116.1 C121.1 C122.1 C123.1 C126.1 IC1.5 IC2.1 IC2.10 IC2.22 IC2.33 IC2.42 IC2.44 IC2.48 IC2.49 IC3.2 IC4.8 IC7.7 IC9.7 IC10.12 IC10.28 IC10.29 IC11.5 IC12.1 IC13.5 IC16.8 IC17.5 IC22.3 IC23.5 IOVDD.TP JP-3V3-1.1 JP-3V3-2.1 R16.1 R17.2 R18.2 R75.1 R86.5 R86.6 R86.7 R86.8 TP_3V3.TP
+5V: C26.1 C85.1 C120.1 C128.1 C131.1 C134.1 C137.1 D1.C IC1.1 IC1.3 IC14.5 IC14.6 IC24.5 IC25.5 IC26.5 IC27.5 JP-EXT-1.1 JP-EXT-2.1 R14.2 R72.2 T2.2 X1.A8 X1.A9 X1.B8 X1.B9
+12V: 12VP.TP C52.1 C53.1 C56.1 C57.1 C60.1 C61.1 C66.1 C67.1 C107.2 C108.1 C140.1 C143.1 C146.1 C149.1 IC6.14 IC7.26 IC8.14 IC9.26 IC15.10 IC28.5 IC29.5 IC30.5 IC31.5 R60.1 R70.1
+14V: 14VP.TP C93.1 C94.1 C95.1 C100.1 C104.1 D3.C IC14.23 IC15.1 IC15.2 R19.1
-12V: 12VN.TP C4.1 C5.1 C6.1 C7.1 C54.1 C55.1 C58.1 C59.1 C62.1 C63.1 C68.1 C69.1 C106.1 C109.1 IC6.3 IC7.27 IC7.29 IC8.3 IC9.27 IC9.29 IC15.6 IC28.2 IC29.2 IC30.2 IC31.2 R67.1 R76.2
-14V: 14VN.TP C96.1 C97.1 C98.1 C101.1 C102.1 D4.A IC14.15 IC15.5 R59.2
ADA_A_IO0: IC6.1 IC7.18
ADA_A_IO1: IC6.16 IC7.17
ADA_A_IO2: IC6.2 IC7.16
ADA_B_IO0: IC8.1 IC9.18
ADA_B_IO1: IC8.16 IC9.17
ADA_B_IO2: IC8.2 IC9.16
ADC_5VP: IC2.41 R72.1 R77.2
ADC_12VN: IC2.40 R67.2 R69.1
ADC_12VP: IC2.39 R70.2 R71.1
ADC_AIN_N [100R_DIFFPAIR]: C24.2 C41.2 R21.1 R46.1
ADC_AIN_P [100R_DIFFPAIR]: C23.1 C41.1 R20.1 R45.2
ADC_BIN_N [100R_DIFFPAIR]: C43.2 C44.2 R23.1 R48.2
ADC_BIN_P [100R_DIFFPAIR]: C42.1 C44.1 R22.1 R47.1
ADC_IN0: IC10.1 R45.1
ADC_IN1: IC10.2 R46.2
ADC_IN2: IC10.8 R48.1
ADC_IN3: IC10.7 R47.2
ADC_RDY: IC2.11 IC10.25 X1.A11
ADC_VUSB: IC2.38 R63.2 R64.1
AI_0+: J1.2 R25.1
AI_1-: J1.3 R26.1
AI_2+: J1.4 R27.1
AI_3-: J1.5 R28.1
AI_4+: J1.6 R29.1
AI_5-: J1.7 R30.1
AI_6+: J1.8 R31.1
AI_7-: J1.9 R32.1
AI_8+: J1.10 R33.1
AI_9-: J1.11 R34.1
AI_10+: J1.12 R35.1
AI_11-: J1.13 R36.1
AI_12+: J1.14 R37.1
AI_13-: J1.15 R38.1
AI_14+: J1.16 R40.1
AI_15-: J1.17 R41.1
AO_0: C127.1 J1.21 R89.2 R90.2
AO_1: C130.1 J1.23 R93.2 R94.2
AO_2: C133.1 J1.25 R97.2 R98.2
AO_3: C136.1 J1.27 R101.2 R102.2
AO_4: C139.1 J1.29 R105.2 R106.2
AO_5: C142.1 J1.31 R109.2 R110.2
AO_6: C145.1 J1.33 R113.2 R114.2
AO_7: C148.1 J1.35 R117.2 R118.2
AVDD: AVDD.TP C17.1 C89.1 IC2.43 IC3.1 IC3.4
BSW_G: IC14.7 T2.1 TP_BSW_G.TP
BUF: BUF.TP C105.2 IC15.8 R74.1
CC1: R62.1 USBC.A5
CC2: R61.1 USBC.B5
DAC_0: DAC0.TP IC22.4 IC24.3
DAC_1: DAC1.TP IC22.13 IC25.3
DAC_2: DAC2.TP IC22.5 IC26.3
DAC_3: DAC3.TP IC22.12 IC27.3
DAC_4: DAC4.TP IC22.6 IC28.3
DAC_5: DAC5.TP IC22.11 IC29.3
DAC_6: DAC6.TP IC22.7 IC30.3
DAC_7: DAC7.TP IC22.10 IC31.3
DAC_!CLR: CLR.TP IC2.18 IC22.9 R86.4 X1.B13
DAC_!LDAC: IC2.17 IC22.1 LDAC.TP R86.2 X1.B12
DAC_FB0: C129.2 FB0.TP IC24.4 R87.2 R88.2 R89.1
DAC_FB1: C8.2 FB1.TP IC25.4 R91.2 R92.2 R93.1
DAC_FB2: C9.2 FB2.TP IC26.4 R95.2 R96.2 R97.1
DAC_FB3: C10.2 FB3.TP IC27.4 R99.2 R100.2 R101.1
DAC_FB4: C14.2 FB4.TP IC28.4 R103.2 R104.2 R105.1
DAC_FB5: C13.2 FB5.TP IC29.4 R107.2 R108.2 R109.1
DAC_FB6: C12.2 FB6.TP IC30.4 R111.2 R112.2 R113.1
DAC_FB7: C11.2 FB7.TP IC31.4 R115.2 R116.2 R117.1
EXT: J1.1 J1.20 JP-EXT-1.2 JP-EXT-2.2
GND: C1.2 C2.2 C3.2 C4.2 C5.2 C6.2 C7.2 C15.2 C16.2 C17.2 C18.2 C19.2 C20.2 C21.2 C22.2 C23.2 C24.1 C25.2 C26.2 C27.2 C28.2 C29.2 C30.2 C31.2 C32.2 C33.2 C34.2 C35.2 C36.2 C37.2 C38.2 C39.2 C40.2 C42.2 C43.1 C45.2 C46.2 C47.2 C48.2 C49.2 C50.2 C51.2 C52.2 C53.2 C54.2 C55.2 C56.2 C57.2 C58.2 C59.2 C60.2 C61.2 C62.2 C63.2 C64.2 C65.2 C66.2 C67.2 C68.2 C69.2 C71.2 C74.2 C75.2 C76.2 C77.2 C78.2 C79.2 C80.2 C81.2 C82.2 C83.2 C84.2 C85.2 C86.2 C87.2 C88.2 C89.2 C90.2 C91.2 C92.2 C93.2 C94.2 C95.2 C96.2 C97.2 C98.2 C99.1 C102.2 C103.2 C104.2 C105.1 C108.2 C109.2 C111.2 C112.2 C113.2 C114.2 C115.2 C116.2 C120.2 C121.2 C122.2 C123.2 C124.2 C125.2 C126.2 C127.2 C128.2 C130.2 C131.2 C133.2 C134.2 C136.2 C137.2 C139.2 C140.2 C142.2 C143.2 C145.2 C146.2 C148.2 C149.2 DBG1.2 DBG1.4 DBG2.2 DBG2.4 ESD1.1 IC1.2 IC2.19 IC2.57 IC3.5 IC4.4 IC6.15 IC7.4 IC7.6 IC7.22 IC7.24 IC7.25 IC8.15 IC9.4 IC9.6 IC9.22 IC9.24 IC9.25 IC10.4 IC10.11 IC10.27 IC10.30 IC10.33 IC11.2 IC12.3 IC13.2 IC14.2 IC14.3 IC14.19 IC14.25 IC15.4 IC15.PAD IC15.PAD1 IC15.PAD2 IC15.PAD3 IC15.PAD4 IC16.4 IC17.3 IC22.14 IC23.2 IC24.2 IC25.2 IC26.2 IC27.2 J1.18 J1.19 J1.22 J1.24 J1.26 J1.28 J1.30 J1.32 J1.34 J1.36 J1.MH1 J1.MH2 L4.1 R12.2 R57.2 R61.2 R62.2 R64.2 R68.2 R69.2 R71.2 R73.2 R77.1 R87.1 R91.1 R95.1 R99.1 R103.1 R107.1 R111.1 R115.1 REF1.2 REF1.3 RESET.2 TP_GND.TP USB_BOOT.2 USBC.A1 USBC.A12 USBC.B1 USBC.B12 X1.A10 X1.A14 X1.A15 X1.A16 X1.A25 X1.A30 X1.A31 X1.A32 X1.B10 X1.B14 X1.B15 X1.B16 X1.B19 X1.B22 X1.B25 X1.B30 X1.B31 X1.B32 X2.2 X2.4
IN0+: C1.1 IC6.4 R25.2
IN1-: C2.1 IC6.13 R26.2
IN2+: C3.1 IC6.5 R27.2
IN3-: C28.1 IC6.12 R28.2
IN4+: C29.1 IC6.6 R29.2
IN5-: C30.1 IC6.11 R30.2
IN6+: C31.1 IC6.7 R31.2
IN7-: C32.1 IC6.10 R32.2
IN8+: C33.1 IC8.4 R33.2
IN9-: C34.1 IC8.13 R34.2
IN10+: C35.1 IC8.5 R35.2
IN11-: C36.1 IC8.12 R36.2
IN12+: C37.1 IC8.6 R37.2
IN13-: C38.1 IC8.11 R38.2
IN14+: C39.1 IC8.7 R40.2
IN15-: C40.1 IC8.10 R41.2
MISO_SEL: IC2.36 IC16.7 IC17.2 X1.A13
MUX_A_OUTA: IC6.8 R43.2
MUX_A_OUTB: IC6.9 R44.1
MUX_B_OUTA: IC8.8 R24.2
MUX_B_OUTB: IC8.9 R42.1
N$1: C20.1 R9.2 R10.1 X2.3
N$3: C129.1 R1.2
N$4: JP-3V3-1.2 X1.A1
N$5: C8.1 R2.2
N$6: JP-3V3-2.2 X1.B1
N$7: C9.1 R3.2
N$9: C10.1 R4.2
N$12: IC7.19 R20.2
N$13: IC7.20 R21.2
N$14: IC24.1 R1.1 R90.1
N$15: IC9.19 R22.2
N$16: IC9.20 R23.2
N$17: C11.1 R5.2
N$18: IC10.13 R15.2
N$19: C72.2 C73.2 R49.1
N$20: C74.1 R49.2 R50.1
N$21: IC11.3 R50.2
N$23: IC25.1 R2.1 R94.1
N$24: D3.A IC14.1 IC14.24 L3.2
N$25: C12.1 R6.2
N$26: IC26.1 R3.1 R98.1
N$28: IC27.1 R4.1 R102.1
N$30: C90.1 L3.1 T2.3
N$31: C13.1 R7.2
N$32: C86.1 IC14.4 IC14.8 IC14.9 IC14.10 IC14.11 R14.1
N$33: IC28.1 R8.1 R106.1
N$35: C91.1 IC14.21
N$36: C92.1 IC14.18
N$37: D4.C IC14.13 IC14.14 L4.2
N$38: R55.2 R55.3 R60.2
N$39: C103.1 IC15.3
N$40: IC29.1 R7.1 R110.1
N$41: C14.1 R8.2
N$42: R56.2 R56.3 R74.2
N$43: R19.2 R53.2 R53.3
N$44: R54.2 R54.3 R58.2
N$58: IC30.1 R6.1 R114.1
N$60: IC31.1 R5.1 R118.1
PGA_A_IN+: IC7.1 R43.1
PGA_A_IN-: IC7.2 IC7.3 R44.2
PGA_B_IN+: IC9.1 R24.1
PGA_B_IN-: IC9.2 IC9.3 R42.2
QSPI_SCLK: IC2.52 IC4.6
QSPI_SD0: IC2.53 IC4.5
QSPI_SD1: IC2.55 IC4.2
QSPI_SD2: IC2.54 IC4.3
QSPI_SD3: IC2.51 IC4.7
REFBY2: C71.1 IC10.3 REFBY2.TP
REFM_A: C70.2 IC10.32
REFM_B: C110.2 IC10.9
REFOUT: C111.1 IC10.5 REFOUT.TP
REFP_A: C70.1 IC10.31
REFP_B: C110.1 IC10.10
RP2040_RST: IC2.26 R75.2 RESET.1 X1.B18
RP_USBD_N [90R_DIFFPAIR]: IC2.46 R13.2
RP_USBD_P [90R_DIFFPAIR]: IC2.47 R39.2
RP_XI: C19.1 IC2.20 R9.1 X2.1
RP_XO: IC2.21 R10.2
SDO_A_0: IC2.27 IC10.24 IC16.1 X1.A17
SDO_A_1: IC2.28 IC10.23 X1.A18
SDO_A_2: IC2.29 IC10.22 X1.A19
SDO_A_3: IC2.30 IC10.21 X1.A20
SDO_B_0: IC2.31 IC10.20 IC16.5 X1.A21
SDO_B_1: IC2.32 IC10.19 X1.A22
SDO_B_2: IC2.34 IC10.18 X1.A23
SDO_B_3: IC2.35 IC10.17 X1.A24
SPI0_CS0: CS0.TP IC2.7 IC10.14 R15.1 X1.A2
SPI0_CS1: CS1.TP IC2.8 IC7.11 X1.A3
SPI0_CS2: CS2.TP IC2.9 IC9.11 X1.A4
SPI0_CS3: CS3.TP IC2.37 IC22.2 R86.3 X1.B2
SPI0_MISO: IC2.6 IC7.8 IC9.8 IC16.2 IC16.6 MISO.TP X1.A7 X1.B7
SPI0_MOSI: IC2.5 IC7.9 IC9.9 IC10.15 IC22.15 MOSI.TP X1.A6 X1.B6
SPI0_SCK: IC2.4 IC7.10 IC9.10 IC10.16 IC22.16 SCK.TP X1.A5 X1.B5
SPI1_CS: IC2.16 X1.A29 X1.B29
SPI1_MISO: IC2.15 X1.A26 X1.B26
SPI1_MOSI: IC2.14 X1.A27 X1.B27
SPI1_SCK: IC2.13 X1.A28 X1.B28
SWCLK: DBG2.1 IC2.24 X1.B23
SWDIO: DBG2.3 IC2.25 X1.B24
UART0_RX: DBG1.1 IC2.2 X1.B20
UART0_TX: DBG1.3 IC2.3 X1.B21
USB_BOOT: R11.1 USB_BOOT.1
USB_SHIELD: C115.1 R68.1 USBC.S1 USBC.S2 USBC.S3 USBC.S4
USBD_N [90R_DIFFPAIR]: ESD1.3 R13.1 USBC.A7 USBC.B7
USBD_P [90R_DIFFPAIR]: ESD1.2 R39.1 USBC.A6 USBC.B6
VBUS: C78.1 C79.1 D1.A ESD1.4 R12.1 R63.1 USBC.A4 USBC.A9 USBC.B4 USBC.B9 VBUS.TP
VFB_12VN: C106.2 IC15.7 R56.1 R76.1 VFB12VN.TP
VFB_12VP: C107.1 IC15.9 R55.1 R73.1 VFB12VP.TP
VFB_14VN: C101.2 IC14.16 R54.1 R59.1 TP_VFB_14VN.TP
VFB_14VP: C100.2 IC14.22 R53.1 R57.1 TP_VFB_14VP.TP
VOCM_A: IC7.21 R51.2 VOCMA.TP
VOCM_B: IC9.21 R52.1 VCOMB.TP
VREF: C15.1 C16.1 IC3.3 R17.1 REF1.1 VREF1.TP
VREF_ADC: C46.1 C72.1 C73.1 IC7.23 IC9.23 IC13.1 IC13.4 R49.3 VREF.TP
VREF_ADC/2: C75.1 IC11.1 IC11.4 R51.1 R52.2 REF/2.TP
VREF_ADC_RAW: C48.1 IC12.2 IC13.3 VREFR.TP
VREF_DAC: C125.1 IC23.1 IC23.4 R88.1 R92.1 R96.1 R100.1 R104.1 R108.1 R112.1 R116.1
VREF_DAC_OUT: C124.1 IC22.8 IC23.3 VREF_DAC.TP
VREF_TPS: C99.2 IC14.17 R58.1 TP_VREF_TPS.TP

## Tracks (layer width: path | path; a pad name or v marks a point on that pad's centre or on a via)
!ADC_RST  (via drill 0.15)
  Top 0.203: IC2.12 19.6,64.58 17.37,64.58 16.06,65.88 16.06,66.2 v15.86,66.41 | IC10.26 19.2,50.55 | 19.2,50.55 18.53,50.55 14.94,46.96 7.22,46.96 6.49,46.23 6.49,45.68 5.72,44.91 4.62,44.91 4.24,45.29 4.24,47.45 X1.A12 6.29,49.5 6.29,57.39 6.74,57.84 9.09,57.84 10.78,59.53 14.15,59.53 14.48,59.86 v14.48,62.75 | R16.2 19.2,50.19 19.2,50.55
  Bottom 0.203: v15.86,66.41 14.48,65.03 v14.48,62.75
!MISO_SEL
  Bottom 0.203: IC17.4 22.96,79.28 22.75,79.49 IC16.3
!QSPI_SS
  Top 0.203: 24.6,67.31 IC2.56 24.69,67.39 24.69,67.74 24.6,67.83 24.6,68.9 21.01,72.5 21.01,74.77 19.75,76.02 19.75,76.72 20.69,77.66 22.3,77.66 IC4.1
  Top 0.406: R18.1 25.93,78.52 23.16,78.52 IC4.1 20.8,79.73 R11.2
+1V1  (via drill 0.15)
  Top 0.203: IC2.50 27.21,66.52 27.21,67.69 26.77,68.14 26.77,68.51 C114.1 | IC2.45 28.57,65.05 29.09,65.05 v29.21,65.16 29.7,65.66 C113.1 | IC2.23 20.43,58.6 C112.1 20.8,56.76 20.8,54.9 v21.86,53.84 | v30.09,59.15 31.19,60.25 v31.73,60.25 | v27.21,70.33 26.74,70.33 26.64,70.23
  Top 0.254: DVDD.TP 26.64,70.7 26.64,70.23 26.64,69.48 C114.1
  Bottom 0.203: v21.86,53.84 27.94,53.84 30.48,56.38 30.48,57.35 29.62,58.21 29.62,58.68 v30.09,59.15 | v31.73,60.25 28.8,63.18 28.8,64.75 v29.21,65.16 27.21,67.16 v27.21,70.33
+3V3  (via drill 0.15, 0.2)
  Top 0.089: 31.22,49.26 31.25,49.23
  Top 0.155: 27.84,68.01 C88.1 | 30.32,64.8 30.39,64.87 C116.1
  Top 0.203: IC2.48 28.75,66.93 C84.1 27.98,68.14 C88.1 | IC2.49 27.59,66.33 27.59,67.76 27.84,68.01 | 30.39,64.87 30.05,64.52 28.61,64.52 IC2.44 27.24,63.16 27.2,63.16 | C87.1 19.62,65.68 IC2.10 21.24,64.06 21.24,64.05 21.24,64.02 | 23.81,67.64 23.8,67.65 23.8,67.55 | 23.81,67.64 23.31,67.14 IC2.1 | C83.1 23.81,68.43 23.81,67.64 | IC2.1 23.51,66.89 | 23.51,66.89 23.57,66.82 | 23.57,66.82 23.71,66.69 | 23.71,66.69 23.81,66.59 23.81,66.62 | 23.71,66.69 23.71,66.52 23.81,66.62 | IC2.49 | IC2.49 26.54,65.04 IC2.48 | 27.49,62.87 27.53,62.87 IC2.42 28.68,61.72 29.38,61.72 C81.1 | 22.15,60.86 22.12,60.86 IC2.22 19.62,58.36 C82.1 | 24.98,60.36 24.98,60.33 IC2.33 27.19,58.11 C80.1 | C18.1 35.71,60.5 36.17,60.96 | 36.17,60.96 v36.31,61.1 R17.2 | IC3.2 36.17,61 36.17,60.96 | IC9.7 37.75,33.29 38.59,33.29 | 38.59,33.29 C50.1 | C51.1 38.7,32.07 38.59,32.19 38.59,33.29 | IC7.7 20.64,33.34 21.39,33.34 | 21.39,33.34 C65.1 | C64.1 21.39,33.34 | 31.25,49.23 30.43,49.23 | 30.43,49.23 30.29,49.23 30.11,49.05 IC10.12 | C76.1 33.34,51.45 31.37,49.48 | 31.27,49.38 31.37,49.48 | IC10.28 23.75,49.27 IC10.29 | C123.1 39.72,43.16 IC23.5 | IC22.3 45.2,63.97 C122.1 | C122.1 C126.1 | R86.5 R86.6 R86.7 R86.8 46.03,68.37 44.89,67.23 C122.1 | C25.1 22.26,48.63 22.09,48.46 19.63,48.46 R16.1 19.27,47.83 v19.22,47.78 | IC13.5 42.43,55.1 v42.54,54.99 | IC2.1 23.61,67.49 23.61,67.91 23.65,67.95 | 23.81,66.85 23.81,67.23 | 23.81,67.23 23.81,67.56 23.8,67.55 | 23.8,67.55 23.7,67.44 23.7,67.34 23.51,67.15 | 23.51,67.15 23.51,66.89 | 23.57,66.82 23.57,66.99 23.81,67.23 | 23.51,67.15 23.81,66.85 | 23.81,66.62 23.81,66.85 | v30.34,49.13 30.43,49.23 | R17.2 | 31.22,49.26 C22.1 31.37,49.48
  Top 0.254: TP_3V3.TP 19.31,93.83 19.43,93.95 | R17.2 39.13,61.78 40.28,60.62 | C49.1 41.88,59.03 40.28,60.62 | C126.1 44.89,62.15 44.51,61.77 41.43,61.77 40.28,60.62
  Top 0.305: IC3.2 36.17,61 | 36.17,61 36.17,60.96 | 36.17,61 36.21,61 v36.31,61.1 | v29.55,63.41 29.55,62.07 C81.1
  Top 0.4: 44.46,55.78 C45.1 C47.1 | 44.46,55.78 44.46,55.14 IC12.1 | 44.46,55.78 44.43,55.81 IC13.5 42.43,56.73 C49.1 | IC11.5 34.28,52.09 34.07,51.88 C76.1 | C25.1 23.75,49.27 | C123.1 39.72,41.32 v39.59,41.19 | v39.56,37.99 39.74,38.17 41.06,38.17 41.85,37.38 41.85,34.91 41.08,34.14 40.63,34.14 39.84,33.35 C50.1
  Top 0.406: R18.2 28.52,75.9 C77.1 27.63,74.92 IC4.8 | 23.71,66.52 21.24,64.05 | 21.24,64.02 20.11,62.89 22.15,60.86 23.81,59.2 24.98,60.36 27.49,62.87 27.2,63.16 26.02,64.34 26.02,64.52 26.54,65.04 | JP-3V3-2.1 JP-3V3-1.1 | JP-3V3-1.1 v12.96,23.26 | v37.69,32.02 38.65,32.02 38.7,32.07 | C64.1 20.46,32.17 v20.23,31.94 | JP-3V3-1.1 13.08,21.19 14.77,21.19 15.09,20.87 IOVDD.TP | v23.6,68 23.65,67.95 | v36.47,51.85 35.74,51.85 IC11.5
  Top 0.508: IC1.5 18.05,95.7 C121.1 19.43,93.95 19.43,91.75 C27.1
  Top 0.813: C27.1 19.86,87.52 18.56,86.21 v18.56,81.4 18.56,76.61 v18.19,76.24 | v24.69,74.65 25.88,74.65 IC4.8 | R75.1 v52.76,79.02 v52.75,79.01
  Bottom 0.203: v42.54,54.99 41.64,54.09 40.77,54.09 38.34,51.66 | C21.1 24.02,82.3 24.34,81.98 IC17.5 23.16,81.18 22.95,81.39 18.98,81.39 | 18.98,81.39 v18.57,81.39 v18.56,81.4 | IC16.8 18.99,81.38 18.98,81.39 | v19.22,47.78 20.41,46.59 29.65,46.59 30.34,47.28 v30.34,49.13
  Bottom 0.305: v29.55,63.41 30.48,63.41 31.38,62.52 34.89,62.52 v36.31,61.1
  Bottom 0.4: v39.59,41.19 39.59,39.92 39.17,39.5 39.17,38.38 v39.56,37.99
  Bottom 0.406: v12.96,23.26 12.96,28.31 16.59,31.94 v20.23,31.94 24.26,31.94 25.53,33.21 36.74,33.21 37.69,32.26 v37.69,32.02 | v23.6,68 24.69,69.09 v24.69,74.65 | v39.59,41.19 39.59,50.42 38.34,51.66 37.75,52.26 36.88,52.26 v36.47,51.85
  Bottom 0.813: v18.19,76.24 19.59,76.24 21.18,74.65 v24.69,74.65 25.86,74.65 27.62,72.9 38.4,72.9 39.79,74.29 39.79,75 46.35,81.56 47.02,81.56 47.71,81.56 50.27,79.01 v52.75,79.01
+5V  (via drill 0.15, 0.35)
  Top 0.203: C134.1 50.5,22.01 | 50.5,22.01 51.13,22.01 IC26.5 51.73,23.34 51.96,23.57 52.85,23.57 53,23.72 53,24.83 53.27,25.1 54.03,25.1 54.7,25.77 54.7,31.57 54.48,31.79 IC27.5 53.81,32.11 C137.1 | IC24.5 44.98,25.15 C128.1 45.93,23.42 47.44,23.42 47.57,23.55 47.99,23.55 48.12,23.42 v49.32,23.42 | v50.51,23.32 v50.5,23.31 50.5,22.01 | IC25.5 17.05,16.09 C131.1 | R72.2 17.68,106.34 19.91,104.11 C26.1
  Top 0.254: IC14.5 IC14.6 32.32,97.59 32.09,97.82 30.99,97.82 29.51,99.3 v29.51,99.41 R14.2
  Top 0.4: v26.33,101.07 23.86,101.07 23.69,101.25
  Top 0.406: X1.A8 X1.B8 | v5.94,29.51 6.72,28.73 6.72,27.44 7.18,26.98 v8.53,26.98 | v10.42,27.89 10.42,25.1 11.33,24.19 13.54,24.19 16.48,21.25 C131.1 | v8.8,49.73 9.55,50.48 9.55,54.33 v9,54.88 | v18.23,15.18 IC25.5
  Top 0.508: T2.2 30.9,101.23 C85.1 | C120.1 15.03,98.28 IC1.3 16.13,99.39 16.49,99.75 v18.14,99.75 | v18.14,99.75 19.91,101.52 C26.1 | IC1.1 18.04,99.64 v18.14,99.75 | JP-EXT-2.1 JP-EXT-1.1 11.89,6.87 v13.04,8.02
  Top 0.813: T2.2 29.75,99.68 R14.2 | C26.1 22.27,102.67 23.69,101.25 D1.C
  Route15 0.406: v50.51,23.32 48.09,20.9 48.09,14.02 47.15,13.08 42.02,13.08 38.95,16.15 19.2,16.15 v18.23,15.18
  Route15 0.508: v13.04,8.02 14.19,9.17 14.19,13.52 15.85,15.18 v18.23,15.18
  Bottom 0.203: v49.32,23.42 50.41,23.42 v50.51,23.32
  Bottom 0.4: v29.51,99.41 27.85,101.07 v26.33,101.07
  Bottom 0.406: X1.A8 2.9,38.39 1.95,37.44 1.95,30.22 2.63,29.54 5.91,29.54 v5.94,29.51 | v8.53,26.98 9.51,26.98 v10.42,27.89 | X1.A9 4.19,40.93 3.4,41.72 3.4,49.1 3.98,49.68 8.75,49.68 v8.8,49.73 | v18.14,99.75 16.7,101.18 3.98,101.18 2.34,99.54 2.34,57.25 4.71,54.88 v9,54.88
  Bottom 0.508: X1.B9 X1.A9 X1.A8
+12V  (via drill 0.15)
  Top 0.203: IC6.14 14.32,25.62 C60.1 14.12,26.97 C61.1 | IC8.14 v32.04,25.51 31.55,25.51 C57.1 31.24,26.9 31.25,26.91 C56.1 | IC7.26 14,35.28 | 14,35.28 C66.1 | C66.1 | C67.1 14,36.5 14,35.28 | IC9.26 31.44,35.23 C52.1 | C146.1 40.37,21.68 40.41,21.72 IC30.5 | C140.1 48.83,13.61 47.96,13.61 47.58,13.23 IC28.5 | C143.1 52.88,38.03 53.17,37.74 IC29.5 | IC31.5 53.95,44.35 C149.1 | v14.14,28.47 14.14,31.27 13.22,32.2 13.22,35.15 13.35,35.28 C66.1 | C52.1 30.7,35.49 30.55,35.34 30.55,31.68 v31.17,31.06 | C53.1 31.2,35.51 C52.1 | 39.69,80.42 40.49,80.42 40.99,79.92 42.89,79.92 43.29,80.32 43.29,80.82 43.49,81.02 44.79,81.02 44.89,80.92 44.89,79.22 45.69,78.42 45.69,77.62 43.89,77.62 43.59,77.92 41.09,77.92 40.79,78.22 40.79,78.72 39.69,79.82 39.69,80.42
  Top 0.254: IC15.10 39.73,79.88 41.09,78.52 C107.2 R60.1 42.57,78.59 43.62,78.59 44.11,79.09 C108.1 | v44.33,78.15 44.43,78.05 R70.1 | v40.23,21.39 40.23,21.49 40.4,21.66 40.4,22.65 IC30.5 40.41,21.71 40.42,21.7 42.68,21.7 43.01,22.03 43.01,23.31 43.32,23.62 44.66,23.62 v45.25,23.03 | v35.64,21.59 33.68,23.55 32.16,23.55 31.94,23.77 v31.94,23.85
  Top 0.4: IC31.5 53.95,43.22 v54,43.17 | v53.97,37 53.97,37.66 IC29.5 | C61.1 v14.14,28.47 | v31.17,31.06 31.17,26.99 31.25,26.91
  Top 0.406: v48.91,12.47 48.91,13.53 48.83,13.61
  Top 0.813: C108.1 44.11,81.81 12VP.TP 44.59,83.66 v44.4,83.85
  Route15 0.406: v31.17,31.06 34.41,31.06 36.19,29.28 36.19,22.14 v35.64,21.59
  Route15 0.813: v44.4,83.85 46.69,81.56 47.71,81.56 49.67,79.61 49.67,65.03 49.39,64.75 49.39,63.22 50.38,62.24 50.38,52.88 51.3,51.95 52.29,51.95 53.38,50.86 53.38,43.79 v54,43.17
  Bottom 0.254: v45.25,23.03 46.61,21.67 50.01,21.67 52.09,23.75 53.5,23.75 | v40.23,21.39 35.84,21.39 v35.64,21.59 | v31.94,23.85 31.94,25.41 v32.04,25.51
  Bottom 0.4: v54,43.17 54,37.03 v53.97,37 | v14.14,28.47 15.97,30.3 25.41,30.3 26.39,31.28 30.95,31.28 v31.17,31.06
  Bottom 0.406: v53.97,37 53.97,25.68 53.5,25.21 53.5,23.75 53.5,20.21 53.52,20.19 50.08,16.75 50.08,14.97 48.91,13.8 v48.91,12.47 | v54,43.17 54,53.8 54.34,54.14 54.34,71.35 48.44,77.25 47.12,77.25 46.23,78.15 v44.33,78.15
  pour Top (no thermals): 39.69,80.42 40.49,80.42 40.96,79.94 42.89,79.94 43.29,80.34 43.29,80.82 43.46,81 44.79,81 44.87,80.92 44.87,79.25 45.69,78.42 45.69,77.69 45.64,77.64 43.81,77.64 43.54,77.92 41.06,77.92 40.74,78.25 40.74,78.72 39.81,79.64 39.77,79.64 39.69,79.72
+14V  (via drill 0.15)
  Top 0.203: C104.1 40.99,83.91 | 35.79,96.12 36.29,96.12 36.69,96.52 41.69,96.52 42.19,97.02 42.19,98.82 42.49,99.12 43.79,99.12 43.99,98.92 43.99,89.32 43.79,89.12 42.39,89.12 42.19,89.32 42.19,91.52 41.39,92.32 41.39,92.22 40.19,92.22 39.99,92.42 39.99,93.62 37.59,96.02 35.79,96.02
  Top 0.254: IC14.23 37.55,96.09 38.39,95.25 D3.C | IC15.2 39.39,83.08 IC15.1
  Top 0.406: C100.1 42.83,91.19 43.3,91.66 C95.1 C94.1 | C94.1 C93.1 | C94.1 43.13,95.25 D3.C 40.51,95.21 R19.1
  Top 0.508: 40.99,83.91 40.17,83.08 39.39,83.08 | v42.17,94.11 43.21,93.06 C95.1
  Top 0.813: C104.1 41.78,83.94 v41.78,85.72
  Bottom 0.508: 14VP.TP 43.04,91.59 42.17,92.46
  Bottom 0.813: v41.78,85.72 43.04,86.98 43.04,91.59 | 14VP.TP 42.17,92.46 v42.17,94.11
  pour Top (no thermals): 35.84,96.14 36.27,96.14 36.66,96.55 41.69,96.55 42.19,97.05 42.19,98.87 42.41,99.09 43.79,99.09 43.94,98.94 43.94,89.32 43.77,89.14 42.34,89.14 42.19,89.3 42.19,91.37 41.34,92.22 40.14,92.22 39.96,92.39 39.96,93.57 37.49,96.05 35.84,96.05
-12V  (via drill 0.15)
  Top 0.203: IC6.3 22.38,25.62 C62.1 C63.1 | IC8.3 39.46,25.51 C59.1 C58.1 | 13.99,34.21 14.58,34.21 15.15,34.78 IC7.27 18.09,34.78 IC7.29 | 13.99,34.21 C69.1 | C68.1 13.99,33.14 13.99,34.21 | IC9.29 35.19,34.73 IC9.27 31.56,34.73 C55.1 C54.1 | IC30.2 41.36,20.72 41.72,21.08 43.43,21.08 C6.1 | C4.1 44.73,13.95 46.44,13.95 v46.55,14.06 46.63,14.14 IC28.2 | C5.1 52.85,36.35 52.41,36.79 IC29.2 | C7.1 52.97,42.65 v52.69,42.93 52.52,43.1 IC31.2 | 33.49,81.42 33.89,81.42 34.19,81.12 34.19,80.32 34.59,79.92 36.39,79.92 36.99,80.52 37.79,80.52 37.79,79.92 37.59,79.72 36.49,79.72 35.89,79.12 35.89,78.22 35.69,78.02 32.39,78.02 32.39,81.22 32.59,81.42 33.49,81.42
  Top 0.254: IC15.6 36.94,80.22 35.38,78.66 R76.2 35.16,78.34 C106.1 33.31,78.34 | 33.31,78.34 32.89,78.34 R67.1 | C109.1 33.38,78.4 33.31,78.34 | IC8.3 37.84,25.51 v37.69,25.36
  Top 0.4: C68.1 15.7,31.24 v16.88,31.24 | v31.15,32.14 v31.16,32.15 C54.1 | C63.1 24.78,26.19 25.11,26.52 25.11,30.81 v24.68,31.24
  Top 0.406: 43.43,21.08 43.7,21.35 v43.7,22.11 | v52.45,36.57 52.23,36.79 IC29.2
  Top 0.813: 12VN.TP 33.01,82.67 33.38,82.3 C109.1 | C106.1 34.71,78.82 34.71,79.22 v34.64,79.29
  Route15 0.406: 52.45,36.68 52.88,36.25 52.88,31.29 48.79,27.2 48.79,26.47 48.43,26.11 46.36,26.11 45.22,24.98 | 52.45,36.68 52.07,37.05 52.07,37.57 52.54,38.03 52.54,42.85 52.62,42.93 v52.69,42.93 | 45.22,24.98 43.44,23.2 43.44,22.68 43.7,22.43 v43.7,22.11 43.7,20.49 47.11,17.08 47.11,14.62 v46.55,14.06 | 52.45,36.68 v52.45,36.57 | 45.22,24.98 44.84,25.36 v37.69,25.36 36.83,26.22 36.83,29.73 34.42,32.14 v31.15,32.14
  Route15 0.813: v34.64,79.29 37.39,79.29 37.49,79.39 44.51,79.39 48.29,75.61 48.29,60.56 47.49,59.76 47.49,54.14 52.16,49.47 52.16,48.27 50.04,46.15 50.04,44.93 50.52,44.45 51.1,44.45 52.62,42.93
  Bottom 0.4: v16.88,31.24 v24.68,31.24 25.73,32.29 31,32.29 v31.15,32.14
  pour Top (no thermals): 37.77,80.52 37.02,80.52 36.44,79.94 34.64,79.94 34.14,80.44 34.14,81.14 33.84,81.44 32.56,81.44 32.37,81.25 32.37,78 32.39,77.97 35.74,77.97 35.91,78.14 35.91,79.17 36.52,79.77 37.62,79.77 37.77,79.92
-14V  (via drill 0.15)
  Top 0.152: IC14.15 33.32,92.8 32.89,92.37 31.33,92.37 26.31,92.37 24.8,90.86 D4.A
  Top 0.203: 22.09,91.42 22.09,91.52 21.99,91.62 | 21.99,91.62 21.99,88.22 22.59,87.62 28.39,87.62 29.19,86.82 30.69,86.82 30.69,87.62 29.49,87.62 29.29,87.82 29.29,89.22 29.19,89.32 26.99,89.32 26.59,89.72 26.59,91.62 27.29,92.32 33.09,92.32 33.39,92.62 33.39,92.72 33.29,92.82 33.09,92.62 22.99,92.62 22.59,92.22 21.99,91.62
  Top 0.254: R59.2 31.33,92.37 | 24.52,88 C97.1 25.58,88.02 C96.1 28.54,88.02 29.36,87.19 C101.1 | 24.52,88 C98.1 | D4.A 24.5,88 24.52,88 | 37.61,83.08 IC15.5
  Top 0.508: C102.1 35.87,83.92 36.71,83.08 37.61,83.08 | v23.08,89.25 23.08,88.16 C98.1
  Top 0.813: C102.1 34.95,84.58 31.02,84.58 30.12,85.47 C101.1
  Bottom 0.508: 14VN.TP 22.95,89.25 v23.08,89.25
  pour Top (isolate 0.254, no thermals): 33.37,93.42 33.37,92.52 33.12,92.28 27.43,92.28 26.66,91.52 26.66,89.75 27.09,89.32 29.21,89.32 29.31,89.22 29.31,87.8 29.44,87.67 30.66,87.67 30.66,86.75 29.27,86.75 28.39,87.62 22.46,87.62 21.99,88.09 21.99,91.69 22.91,92.62 33.04,92.62 33.27,92.84 33.27,93.42
ADA_A_IO0
  Top 0.203: IC7.18 19.09,39.45 19.36,39.72 25.49,39.72 27.75,37.46 27.75,27.46 24.61,24.32 IC6.1
ADA_A_IO1  (via drill 0.15)
  Top 0.203: IC7.17 19.59,39.25 19.76,39.43 22.79,39.43 23.02,39.2 v23.1,39.2 | v24.4,40.24 24.62,40.01 25.66,40.01 28.09,37.58 28.09,27.35 24.7,23.96 20.79,23.96 20.42,24.32 IC6.16
  Bottom 0.203: v23.1,39.2 24.13,40.24 v24.4,40.24
ADA_A_IO2
  Top 0.203: IC6.2 22.84,24.97 23.18,24.64 24.48,24.64 27.46,27.62 27.46,37.3 25.33,39.43 24.05,39.43 23.31,38.69 22.89,38.69 22.44,39.14 20.37,39.14 20.09,38.85 IC7.16
ADA_B_IO0
  Top 0.203: IC9.18 36.19,39.21 36.59,39.62 42.02,39.62 42.92,38.72 42.92,25.84 42.25,25.17 40.25,25.17 39.29,24.21 IC8.1
ADA_B_IO1  (via drill 0.15)
  Top 0.203: IC9.17 36.69,39.13 36.88,39.33 39.83,39.33 v40.05,39.1 | v41.38,40.14 41.6,39.91 42.14,39.91 43.21,38.84 43.21,25.72 42.33,24.84 40.48,24.84 39.37,23.73 37.46,23.73 37.23,23.96 33.91,23.96 33.66,24.21 IC8.16
  Bottom 0.203: v40.05,39.1 41.08,40.14 v41.38,40.14
ADA_B_IO2
  Top 0.203: IC8.2 39.42,24.86 40.04,25.48 42.15,25.48 42.63,25.96 42.63,38.6 41.9,39.33 41,39.33 40.26,38.59 39.84,38.59 39.39,39.04 37.49,39.04 37.19,38.73 IC9.16
ADC_5VP  (via drill 0.15)
  Top 0.203: R72.1 R77.2 9.03,92.87 v9.22,92.68 | v29.7,60.59 29.7,60.71 29.09,61.32 28.51,61.32 IC2.41
  Bottom 0.203: v9.22,92.68 16.85,85.05 16.84,76.62 16.84,76.23 17.6,75.47 17.6,74.42 16.78,73.6 16.78,70.54 19.75,67.57 19.75,60.28 20,60.03 29.14,60.03 v29.7,60.59
ADC_12VN  (via drill 0.15)
  Top 0.203: IC2.40 28.46,60.8 v28.83,60.8 | R69.1 30.39,77.05 v30.37,77.03 30.37,75.83 v26.82,72.28
  Top 0.254: R69.1 R67.2
  Bottom 0.203: v28.83,60.8 28.48,61.15 28.48,65.48 26.69,67.26 26.69,72.15 v26.82,72.28 | 30.34,77 v30.37,77.03
ADC_12VP  (via drill 0.15)
  Top 0.203: IC2.39 28.85,59.85 30.3,59.85 31.43,60.98 31.43,61.64 31.21,61.86 31.21,62.78 v31.64,63.21 | v43.95,76.19 44.51,76.75 R70.2
  Top 0.254: R71.1 R70.2
  Bottom 0.203: v31.64,63.21 32.42,63.99 32.42,65.97 40.73,74.28 40.73,74.71 42.25,76.22 43.91,76.22 v43.95,76.19
ADC_AIN_N  (via drill 0.15)
  Top 0.121: C41.2 18.19,43.74 18.19,44.47 18.67,44.95 20.27,44.95 23.21,42.01 24.04,42.01 24.41,41.64 24.41,41.12 v24.67,41.12 | 24.78,42.93 24.78,42.75 | 24.78,42.75 v24.78,42.6 v24.77,42.6 | R46.1 24.74,42.78 24.78,42.75
  Top 0.4: C24.2 R21.1 17.78,43.26 C41.2
  Bottom 0.121: v24.67,41.12 24.41,41.12 24.41,42.6 v24.77,42.6
ADC_AIN_P  (via drill 0.15)
  Top 0.121: C41.1 18.51,43.83 18.51,44.35 18.79,44.63 20.15,44.63 23.09,41.69 23.92,41.69 24.09,41.52 24.09,41.12 v23.83,41.12 | 23.61,42.92 23.61,42.62 v23.6,42.6 R45.2
  Top 0.4: C41.1 19.04,42 R20.1 20.02,41.86 C23.1
  Bottom 0.121: v23.83,41.12 24.09,41.12 24.09,42.6 v23.6,42.6
ADC_BIN_N  (via drill 0.15)
  Top 0.121: R48.2 28.88,42.73 28.88,41.84 29.06,41.66 31.21,41.66 32.61,43.06 32.61,44.05 33.75,45.19 35.37,45.19 35.72,45.54 35.72,46.02 v35.46,46.02 | C44.2 35.4,44.05 v35.4,44.29
  Top 0.4: C43.2 34.82,41.87 R23.1 34.84,43.35 C44.2
  Bottom 0.121: v35.46,46.02 35.72,46.02 35.72,44.29 v35.4,44.29
ADC_BIN_P  (via drill 0.15)
  Top 0.121: R47.1 28.56,42.74 28.56,41.72 28.94,41.34 31.33,41.34 32.93,42.94 32.93,43.93 33.87,44.87 35.49,44.87 36.04,45.42 36.04,46.02 v36.3,46.02 | v36.3,44.29 | C44.1 36.07,44.06 v36.3,44.29
  Top 0.4: C42.1 R22.1 36.07,41.98 C44.1
  Bottom 0.121: v36.3,46.02 36.04,46.02 36.04,44.29 v36.3,44.29
ADC_IN0
  Top 0.203: IC10.1 24.43,45.46 23.97,45 23.97,44.77 R45.1
ADC_IN1
  Top 0.203: IC10.2 24.93,45.38 24.41,44.87 24.41,44.73 R46.2
ADC_IN2
  Top 0.203: IC10.8 27.93,46.08 28.94,45.07 28.94,44.8 R48.1
ADC_IN3
  Top 0.203: IC10.7 27.43,46.01 28.45,45 28.45,44.74 R47.2
ADC_RDY  (via drill 0.15)
  Top 0.203: IC2.11 19.87,64.87 18.61,64.87 18.34,65.14 v17.73,65.14 | X1.A11 6.58,47.25 | IC10.25 18.61,51.05 14.82,47.25 6.58,47.25 | v15.42,64.14 15.42,62.36 14.77,61.71 14.77,59.74 14.27,59.24 10.9,59.24 9.21,57.55 6.86,57.55 6.58,57.27 6.58,47.25
  Bottom 0.203: v17.73,65.14 16.42,65.14 v15.42,64.14
ADC_VUSB  (via drill 0.15)